# EAGLE board PROJETO FINAL SISTEMAS DIGITAIS (EAGLE 9.7.0)

Size 184.17 x 65.85 mm. Coordinates in mm from the lower left corner, seen from the top.
Outline: 0,0 184.17,0 184.17,65.85 0,65.85 0,0
Copper layers (1*16): Top 0.035mm / dielectric 1.5mm / Bottom 0.035mm
Design rules "default": minimum track width 6mil, minimum drill 0.35mm, track to track 6mil, track to pad 6mil, pad to pad 6mil, via to via 6mil, smd to smd 6mil, copper to edge 40mil, drill to drill 6mil, minimum pad ring 10mil, minimum via ring 8mil, stop-mask expansion 4mil, vias tented up to drill 0mil, thermal gap 10mil

## Footprints (pad centres in the part's own frame; a part is rotated, then mirrored left to right if it is on the bottom)
LEDRD254W60D565H860B = drill 0.981 pad 1.581: 1 -1.27,0; 2 1.27,0
LEDRD254W60D565H860B_Y = drill 0.981 pad 1.581: 1 -1.27,0; 2 1.27,0
LEDRD254W60D565H860B_G = drill 0.981 pad 1.581: 1 -1.27,0; 2 1.27,0
RESAD1016W63L850D250B = drill 0.83 pad 1.43: 1 -5.08,0; 2 5.08,0
SWITCH-MOMENTARY-PTH-6.5MM = drill 1.016 pad 1.88: 1 -3.251,2.261; 2 3.251,2.261; 3 -3.251,-2.261; 4 3.251,-2.261
ARDUINO-UNO-R3-SHIELD = drill 1.016 pad 1.88: 3.3V 24.13,-2.54; 5V 24.13,0; A0 24.13,12.7; A1 24.13,15.24; A2 24.13,17.78; A3 24.13,20.32; A4 24.13,22.86; A5 24.13,25.4; AREF -24.13,-13.97; D2 -24.13,20.32; D3 -24.13,17.78; D4 -24.13,15.24; D5 -24.13,12.7; D6 -24.13,10.16; D7 -24.13,7.62; D8 -24.13,3.81; D9 -24.13,1.27; D10 -24.13,-1.27; D11 -24.13,-3.81; D12 -24.13,-6.35; D13 -24.13,-8.89; GND@0 24.13,2.54; GND@1 24.13,5.08; GND@2 -24.13,-11.43; IOREF 24.13,-7.62; NC 24.13,-10.16; RES 24.13,-5.08; RX -24.13,25.4; SCL -24.13,-19.05; SDA -24.13,-16.51; TX -24.13,22.86; VIN 24.13,7.62
DIP762W53P254L1969H508Q14B = drill 0.743 pad 1.343: 1 -3.81,7.62; 2 -3.81,5.08; 3 -3.81,2.54; 4 -3.81,0; 5 -3.81,-2.54; 6 -3.81,-5.08; 7 -3.81,-7.62; 8 3.81,-7.62; 9 3.81,-5.08; 10 3.81,-2.54; 11 3.81,0; 12 3.81,2.54; 13 3.81,5.08; 14 3.81,7.62

## Placement (x,y rotation side)
D5  RED  [LEDRD254W60D565H860B]  127.33,44.18 180 top
D6  YELLOW  [LEDRD254W60D565H860B_Y]  122.25,44.18 180 top
D7  GREEN  [LEDRD254W60D565H860B_G]  117.17,44.18 180 top
R2  220  [RESAD1016W63L850D250B]  115.91,56.88 270 top
R3  220  [RESAD1016W63L850D250B]  120.98,56.88 270 top
R4  220  [RESAD1016W63L850D250B]  126.06,56.88 270 top
R8  10k  [RESAD1016W63L850D250B]  138.76,56.88 270 top
S2  SWITCH_MOMENTARY  [SWITCH-MOMENTARY-PTH-6.5MM]  141.31,37.83 90 top
U3  ARDUINO-UNO-R3-SHIELD  [ARDUINO-UNO-R3-SHIELD]  47.88,29.84 270 top
U4  74HC32_PDIP  [DIP762W53P254L1969H508Q14B]  169.25,37.83 90 top

## Library data of the parts
D5 = Tinkercad; CATEGORY: Opto-Electronic; SUB-CATEGORY: LED; VALUE: LED_RED
D6 = Tinkercad; CATEGORY: Opto-Electronic; SUB-CATEGORY: LED; VALUE: LED_YELLOW
D7 = Tinkercad; CATEGORY: Opto-Electronic; SUB-CATEGORY: LED; VALUE: LED_GREEN
R2-R4 R8 S2 U3 U4 = Tinkercad

## Nets
D5_C: D5.2 R4.2
D6_C: D6.2 R3.2
D7_C: D7.2 R2.2
U3_5V: S2.3 S2.4 U3.5V U4.14
U3_D6: U3.D6 U4.3
U3_D7: R8.2 S2.1 S2.2 U3.D7 U4.1
U3_D8: D5.1 U3.D8 U4.2
U3_D9: D6.1 U3.D9
U3_D10: D7.1 U3.D10
U3_GND: R2.1 R3.1 R4.1 R8.1 U3.GND@0 U3.GND@1 U3.GND@2 U4.7

## Tracks (layer width: path | path; a pad name or v marks a point on that pad's centre or on a via)
D5_C  (1 unrouted)
D6_C  (1 unrouted)
D7_C  (1 unrouted)
U3_5V  (3 unrouted)
U3_D6  (1 unrouted)
U3_D7  (4 unrouted)
U3_D8  (2 unrouted)
U3_D9  (1 unrouted)
U3_D10  (1 unrouted)
U3_GND  (7 unrouted)